# Altium PCB Board_4_Layout.PcbDoc
Units mil, origin at the board's own origin, x right, y up, seen from the top; angles counter-clockwise.
Board outline 4315 x 2510 mil, 4 copper layers (Top Layer 1, Ground 1, Ground 2, Bottom Layer 1), stack 70.112 mil thick; 80 components, 45 nets, 287 pads, 0 vias.
Unrouted connection lines stored in the file: 212.
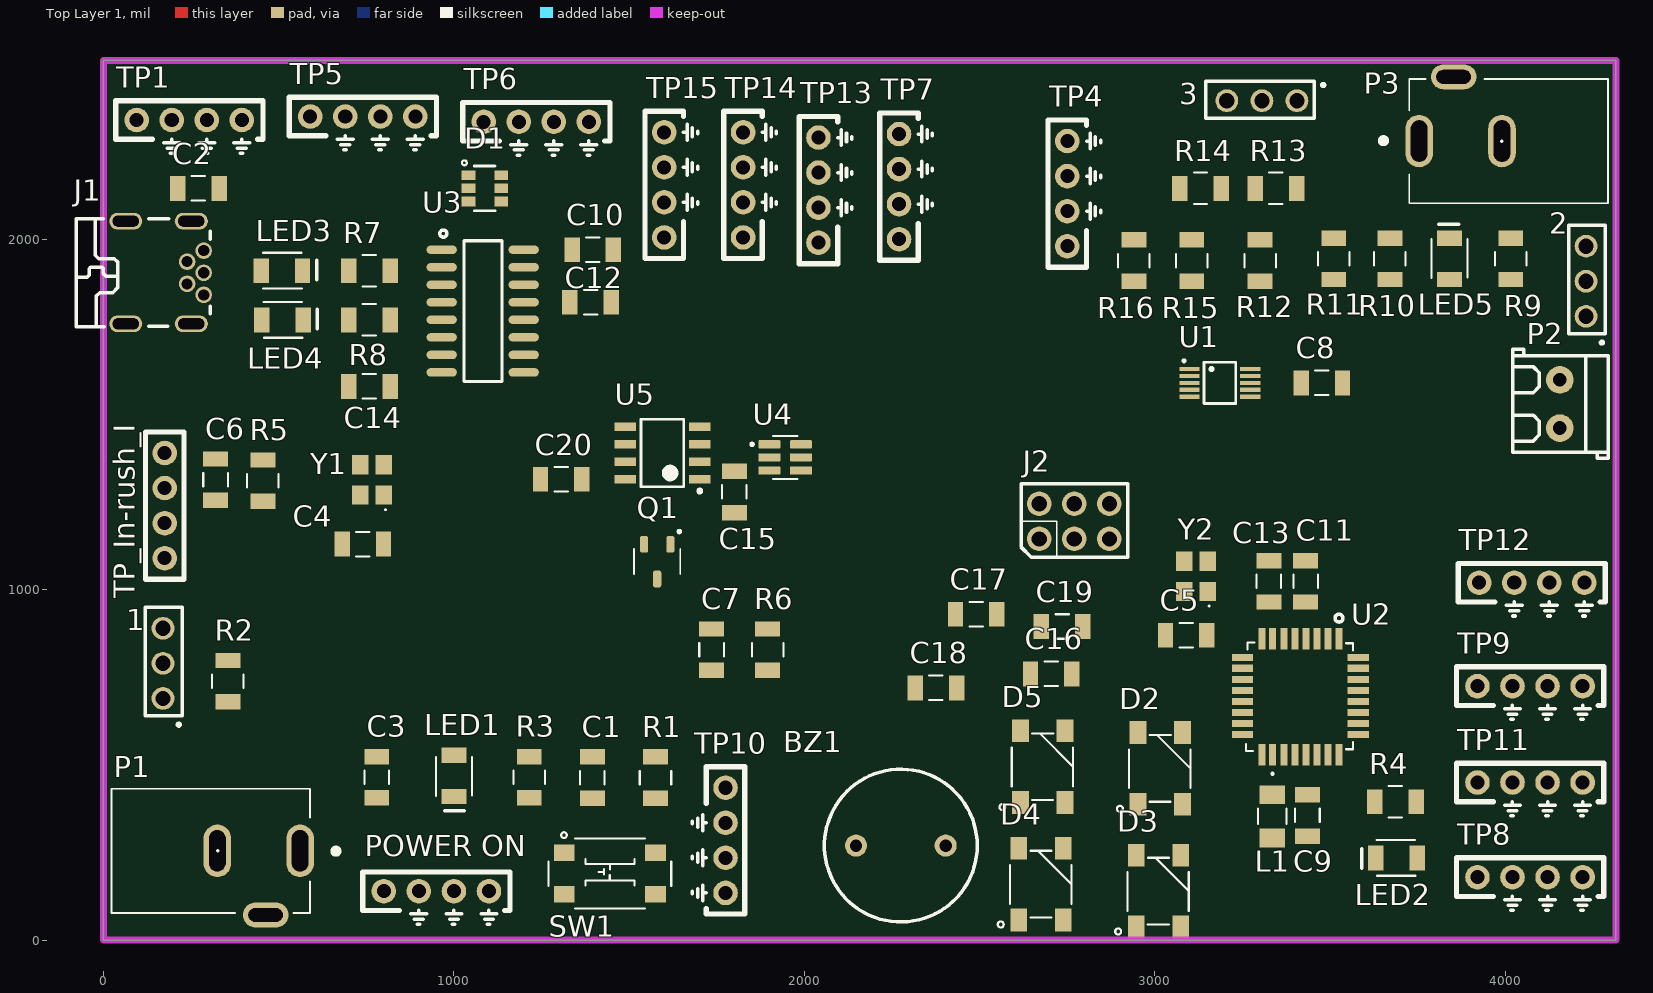
[diagram p0: Top Layer 1 view]
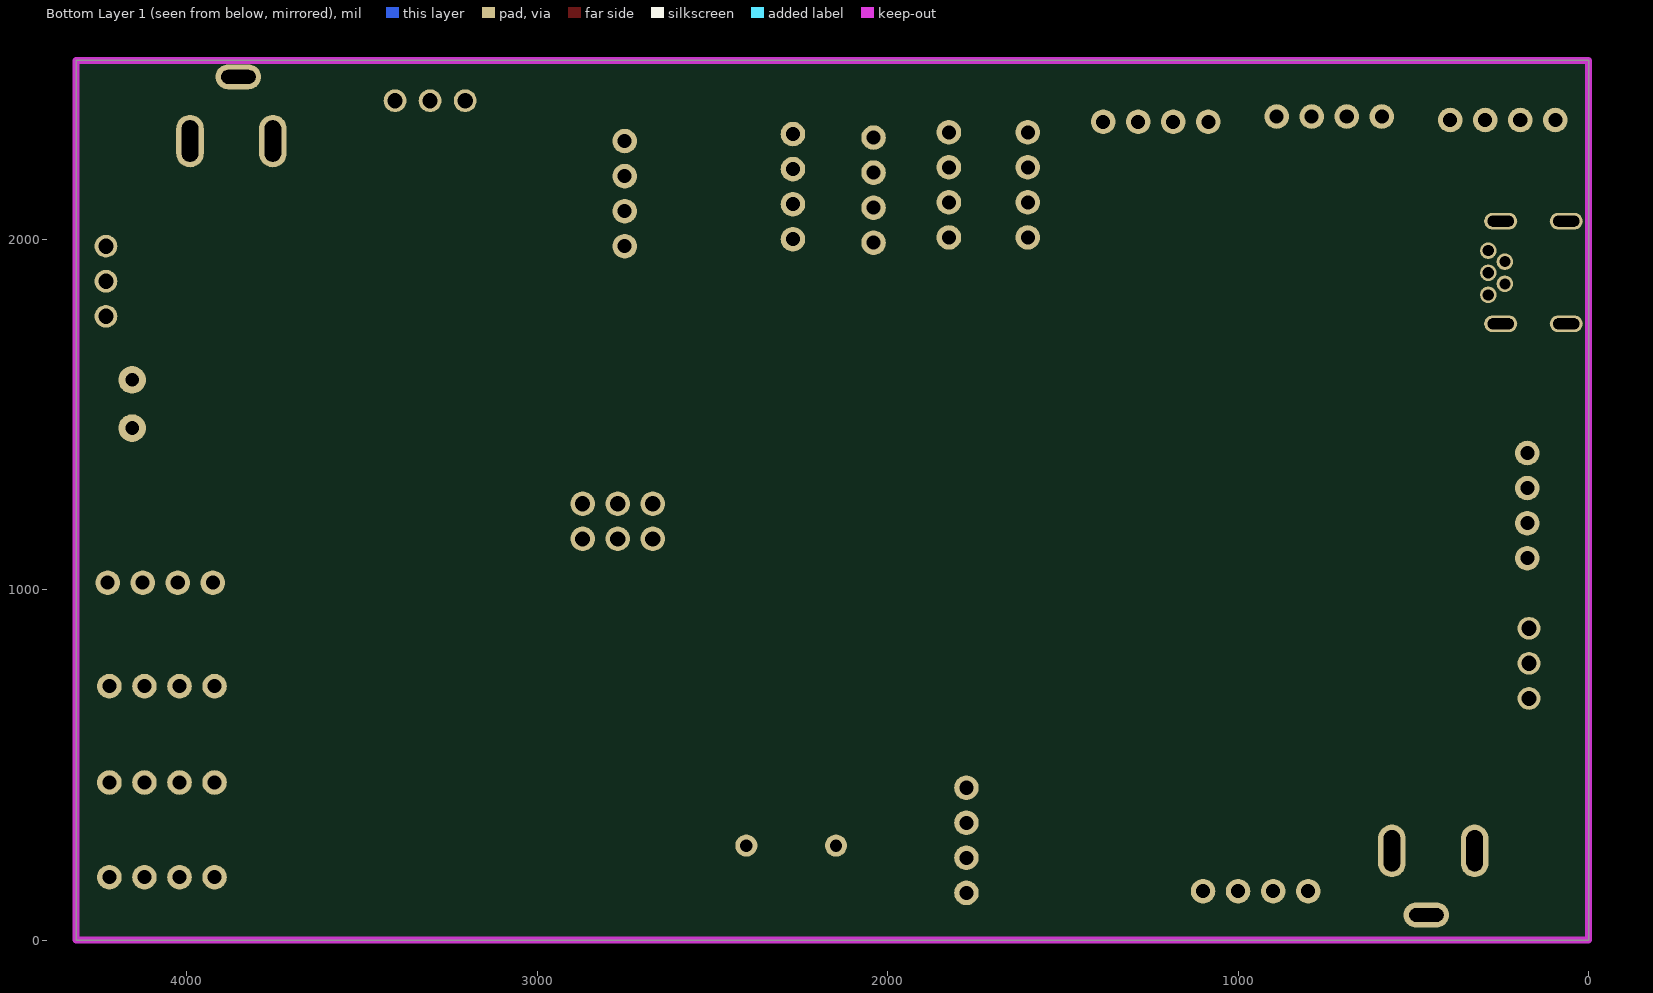
[diagram p1: Bottom Layer 1 view, seen from below]

## Layer stack, top to bottom
Top Solder: solder mask 0.4, Solder Resist, Dk 3.5
Top Layer 1: signal copper 1.378
Dielectric 2: prepreg 2.8, PP-006, Dk 4.1
Ground 1: signal copper 1.378
Dielectric 1: core 59, Core-043, Dk 4.3
Ground 2: signal copper 1.378
Dielectric 3: prepreg 2.8, PP-006, Dk 4.1
Bottom Layer 1: signal copper 1.378
Bottom Solder: solder mask 0.4, Solder Resist, Dk 3.5

## Board outline
0,0 4315,0 4315,2510 0,2510

## Design rules (kind name [scope] priority, off if disabled: settings)
BoardOutlineClearance [All] p1: gap=10 ignorepadtopadclearanceinfootprint=FALSE except(0: Arc-SplitContinuation Track-SplitContinuation SMDPad-SplitContinuation THPad-SplitContinuation Via-SplitContinuation Fill-SplitContinuation Poly-SplitContinuation Region-SplitContinuation Text-SplitContinuation)
Clearance [All] p1: gap=10 ignorepadtopadclearanceinfootprint=FALSE
HoleSize [All] p1: absolutevalues=TRUE maxlimit=120 minlimit=1 maxpercent=80.000 minpercent=20.000
PlaneClearance [All] p1: clearance=10
PlaneConnect [All] p1: planeconnectstyle=Direct reliefexpansion=20 reliefentries=4 reliefconductorwidth=10 reliefairgap=10
PolygonConnect [All] p1: thpad.connectstyle=Relief thpad.reliefconductorwidth=10 thpad.reliefentries=4 thpad.polygonreliefangle="90 Angle" thpad.airgapwidth=10 smdpad.connectstyle=Direct smdpad.reliefconductorwidth=10 smdpad.reliefentries=4 smdpad.polygonreliefangle="90 Angle" smdpad.airgapwidth=10 via.connectstyle=Direct via.reliefconductorwidth=10 via.reliefentries=4 via.polygonreliefangle="90 Angle" via.airgapwidth=10
RoomDefinition PCB_Board4_schematic [InComponentClass('PCB_Board4_schematic')] p1: confinementstyle=ConfineIn formatcopy=TRUE lockcomponents=FALSE outline -1000,2415 14965,2415 14965,3190 -1000,3190
RoutingVias [All] p1: holewidth=13 width=25 viastyle="Through Hole" minholewidth=13 minwidth=25 maxholewidth=60 maxwidth=80
SolderMaskExpansion [All] p1: expansion=4 istentingtop=FALSE
UnRoutedNet [All] p1: checkbadconnections=TRUE
Width "Schematic Width Constraint_4" [InNet('GND')] p1: maxlimit=100 minlimit=10 preferedwidth=20 toplayer_minwidth=20 midlayer1_maxwidth=10 midlayer1_prefwidth=10 midlayer2_maxwidth=10 midlayer2_prefwidth=10 bottomlayer_minwidth=20 minimp=50.000000 maximp=50.000000 favimp=50.000000
Width "Schematic Width Constraint_3" [InNet('ADP_+5V')] p2: maxlimit=100 minlimit=10 preferedwidth=20 toplayer_minwidth=20 midlayer1_maxwidth=10 midlayer1_prefwidth=10 midlayer2_maxwidth=10 midlayer2_prefwidth=10 bottomlayer_minwidth=20 minimp=50.000000 maximp=50.000000 favimp=50.000000
Width "Schematic Width Constraint_2" [InNet('+5V')] p3: maxlimit=100 minlimit=10 preferedwidth=20 toplayer_minwidth=20 midlayer1_maxwidth=10 midlayer1_prefwidth=10 midlayer2_maxwidth=10 midlayer2_prefwidth=10 bottomlayer_minwidth=20 minimp=50.000000 maximp=50.000000 favimp=50.000000
Width "Schematic Width Constraint_1" [InNet('+5')] p4: maxlimit=100 minlimit=10 preferedwidth=20 toplayer_minwidth=20 midlayer1_maxwidth=10 midlayer1_prefwidth=10 midlayer2_maxwidth=10 midlayer2_prefwidth=10 bottomlayer_minwidth=20 minimp=50.000000 maximp=50.000000 favimp=50.000000
Width "Schematic Width Constraint" [InNet('USB_+5V')] p5: maxlimit=100 minlimit=10 preferedwidth=20 toplayer_minwidth=20 midlayer1_maxwidth=10 midlayer1_prefwidth=10 midlayer2_maxwidth=10 midlayer2_prefwidth=10 bottomlayer_minwidth=20 minimp=50.000000 maximp=50.000000 favimp=50.000000
Width [All] p6: maxlimit=100 minlimit=6 preferedwidth=6 minimp=50.000000 maximp=50.000000 favimp=50.000000
26 further rules are at their usual default settings.

## Components (designator, comment, footprint, x,y, rotation, side; value= is the part's Value field where it differs from the comment)
1 "PREC003SAAN-RC" 3_PIN_100mil 170,690 r90 top value="CONN HEADER VERT 3POS 2.54MM"
2 "PREC003SAAN-RC" 3_PIN_100mil 4230,1780 r90 top value="CONN HEADER VERT 3POS 2.54MM"
3 "PREC003SAAN-RC" 3_PIN_100mil 3405,2395 r180 top value="CONN HEADER VERT 3POS 2.54MM"
BZ1 "AT-1224-TWT-5V-2-R" "BUZZER- TH" 2275,270 r90 top
C1 "1uF" 1206_Passive_Capacitor 1395,464 r90 top
C2 "22uF" 1206_Passive_Capacitor 271,2145 r0 top
C3 "22uF" 1206_Passive_Capacitor 780,465 r90 top
C4 "22pF" 1206_Passive_Capacitor 740,1130 r0 top
C5 "22pF" 1206_Passive_Capacitor 3089,870 r0 top
C6 "22pF" 1206_Passive_Capacitor 320,1314 r90 top
C7 "22pF" 1206_Passive_Capacitor 1735,829 r90 top
C8 "22uF" 1206_Passive_Capacitor 3476,1590 r0 top
C9 "22uF" 1206_Passive_Capacitor 3435,356 r90 top
C10 "22uF" 1206_Passive_Capacitor 1396,1970 r180 top
C11 "22uF" 1206_Passive_Capacitor 3430,1024 r270 top
C12 "22uF" 1206_Passive_Capacitor 1390,1820 r180 top
C13 "22uF" 1206_Passive_Capacitor 3325,1024 r270 top
C14 "22uF" 1206_Passive_Capacitor 759,1580 r180 top
C15 "22uF" 1206_Passive_Capacitor 1800,1279 r270 top
C16 "22uF" 1206_Passive_Capacitor 2704,760 r0 top
C17 "22uF" 1206_Passive_Capacitor 2490,930 r0 top
C18 "22uF" 1206_Passive_Capacitor 2375,720 r0 top
C19 "22uF" 1206_Passive_Capacitor 2735,895 r0 top
C20 "22uF" 1206_Passive_Capacitor 1306,1315 r180 top
D1 "SRV05-4-P-T7" TVS 1087.76,2145 r0 top value="TVS DIODE 5.5V 6TSOP"
D2 "IN-PI55QATPRPGPBPW" "SERIAL_LED - duplicate" 3015,490 r90 top
D3 "IN-PI55QATPRPGPBPW" "SERIAL_LED - duplicate" 3010,140 r90 top
D4 "IN-PI55QATPRPGPBPW" "SERIAL_LED - duplicate" 2675,160 r90 top
D5 "IN-PI55QATPRPGPBPW" "SERIAL_LED - duplicate" 2680,495 r90 top
J1 "USB Mini" USB_MINI_B 175,1905 r270 top value="USB mini B"
J2 "NRPN032PAEN-RC" ICSP 2670,1145 r90 top
L1 "FB_10uH_1206" AIML-1206_ABR-M 3335,353.5 r270 top
LED1 "Red" LED_1206 1000,469 r270 top
LED2 "Red" LED_1206 3689,235 r180 top
LED3 "Yellow" LED_1206 509,1910 r0 top
LED4 "Green" LED_1206 511,1770 r0 top
LED5 "Red" LED_1206 3840,1944 r90 top
P1 "Power Jack" Power_Jack 561.22,255 r180 top value="CONN PWR JACK 2X5.5MM SOLDER"
P2 "2P Screw Terminal Block" "P_Terminal block 3.5mm-pitch" 4155,1530 r270 top
P3 "Power Jack" Power_Jack 3753.78,2280 r0 top value="CONN PWR JACK 2X5.5MM SOLDER"
"POWER ON" "10x Probe TP" TP10x_Probe 950,140 r0 top
Q1 "AO3400A" N-MOSFET 1580,1080 r270 top value="N channel"
R1 "10k" 1206_Passive_Resitor 1575,464 r90 top value=10KOhm
R2 "500m" 1206_Passive_Resitor 355,739 r270 top value=500mOhm
R3 "1k" 1206_Passive_Resitor 1215,465 r270 top value="1K Ohm"
R4 "1k" 1206_Passive_Resitor 3686,395 r0 top value="1K Ohm"
R5 "1M" 1206_Passive_Resitor 455,1311 r90 top value="1M Ohm"
R6 "1M" 1206_Passive_Resitor 1895,829 r90 top value="1M Ohm"
R7 "1k" 1206_Passive_Resitor 759,1910 r180 top value="1K Ohm"
R8 "1k" 1206_Passive_Resitor 759,1770 r180 top value="1K Ohm"
R9 "10k" 1206_Passive_Resitor 4015,1944 r270 top value=10KOhm
R10 "10k" 1206_Passive_Resitor 3670,1944 r270 top value=10KOhm
R11 "10k" 1206_Passive_Resitor 3510,1944 r90 top value=10KOhm
R12 "10k" 1206_Passive_Resitor 3300,1939 r90 top value=10KOhm
R13 "10 Ohm" 1206_Passive_Resitor 3345,2145 r180 top
R14 "1 Ohm" 1206_Passive_Resitor 3130,2145 r180 top
R15 "0 Ohm" 1206_Passive_Resitor 3105,1939 r270 top
R16 "0 Ohm" 1206_Passive_Resitor 2940,1939 r90 top
SW1 "TL3305AF160QG" Switch_JLC 1445,190 r0 top
TP1 "10x Probe TP" TP10x_Probe 245,2340 r0 top
TP4 "TP_VRM+" TP10x_Probe 2750,2130 r90 top
TP5 "TP_USB_D+" TP10x_Probe 740,2350 r0 top
TP6 "TP_USB_D-" TP10x_Probe 1235,2335 r0 top
TP7 "TP_DAC_Vout" TP10x_Probe 2270,2150 r90 top
TP8 "TP_SDA" TP10x_Probe 4070,180 r0 top
TP9 "TP_RxD" TP10x_Probe 4070,725 r0 top
TP10 "TP_Buzzer" TP10x_Probe 1775,285 r270 top
TP11 "TP_SCL" TP10x_Probe 4070,450 r0 top
TP12 "TP_TxD" TP10x_Probe 4075,1020 r0 top
TP13 "TP_Vth" TP10x_Probe 2040,2140 r90 top
TP14 "TP_Comp_Out" TP10x_Probe 1825,2155 r90 top
TP15 "TP_Op_Amp_Vout" TP10x_Probe 1600,2155 r90 top
TP_In-rush_I "TP_In-rush_current" TP10x_Floating 175,1240 r90 top
U1 "ADS1115IDGSR" ADC_ADS1115IDGSR 3185,1590 r0 top
U2 "ATMEGA328P-ANR" ATMega328P 3415,695 r90 top value="IC MCU 8BIT 32KB FLASH 32TQFP"
U3 "CH340G" "USB to serial" 1082,1795 r270 top value="USB to Serial"
U4 "DAC IC" MCP4725 1945.08,1377.4 r0 top
U5 "MCP6002T-I/SN" SOIC127P600X175-8N 1595,1390 r180 top
Y1 "X322512MSB4SI" "Crystal resonator" 764.57,1313.3 r90 top value=12MHz
Y2 "X322516MLB4SI" "Crystal resonator" 3114.57,1038.3 r90 top value=16MHz

## Footprints (in the part's own frame and the unit in brackets; to place one, negate y for a bottom-side part, rotate by r counter-clockwise, add the part's x,y. Pads: shape width x height; smd on the part's side, far side on the other; paste and mask are expansions set on the pad)
3_PIN_100mil [mm]
  round 1.65 hole 1.1: 1(0,0) 2(2.54,0) 3(5.08,0)
  silkscreen extent -2,-1.4 6.6,1.27, body extent -1.14,-1.27 6.48,1.27, height 8.38
1206_Passive_Capacitor [mil]
  rect 44x71 smd: 1(-59,0) 2(59,0)
  silkscreen extent -19,-35 19,35, body extent -63,-31 63,32, height 50
1206_Passive_Resitor [mil]
  rect 44x71 smd: 1(-59,0) 2(59,0)
  silkscreen extent -19,-45 19,45, body extent -61,-31 61,31, height 26
ADC_ADS1115IDGSR [mm] "*SOP50P490X110-10N"
  rect 1.45x0.3 smd mask+0.025: 1(-2.2,1)
  rect 1.47x0.3 smd mask+0.025: 2(-2.2,0.5) 3(-2.2,0) 4(-2.2,-0.5) 5(-2.2,-1) 6(2.2,-1) 7(2.2,-0.5) 8(2.2,0) 9(2.2,0.5) 10(2.2,1)
  silkscreen extent -2.68,-1.5 1.15,1.68, body extent -2.44,-1.49 2.46,1.51, height 1.1
AIML-1206_ABR-M [mil]
  rect 54x73 smd paste+0 mask+0: 1(-61.5,0) 2(61.5,0)
  silkscreen extent -124,-41 22,41, body extent -66,-36 66,36, height 55
ATMega328P [mm]
  rect 1.55x0.508 smd mask+0.025: 1(4.2,-2.794) 2(4.2,-2.007) 3(4.2,-1.194) 4(4.2,-0.406) 5(4.2,0.406) 6(4.2,1.194) 7(4.2,2.007) 8(4.2,2.794) 17(-4.2,2.794) 18(-4.2,2.007) 19(-4.2,1.194) 20(-4.2,0.406) 21(-4.2,-0.406) 22(-4.2,-1.194) 23(-4.2,-2.007) 24(-4.2,-2.794)
  rect 0.508x1.55 smd mask+0.025: 9(2.843,4.2) 10(2.056,4.2) 11(1.243,4.2) 12(0.455,4.2) 13(-0.357,4.2) 14(-1.145,4.2) 15(-1.958,4.2) 16(-2.745,4.2) 25(-2.745,-4.2) 26(-1.958,-4.2) 27(-1.145,-4.2) 28(-0.357,-4.2) 29(0.455,-4.2) 30(1.243,-4.2) 31(2.056,-4.2) 32(2.843,-4.2)
  silkscreen extent -3.94,-3.81 5.97,3.94, body extent -4.45,-4.47 4.55,4.53, height 1.16
"BUZZER- TH" [mm]
  round 1.6 hole 0.9: 1(0,3.25) 2(0,-3.25)
  silkscreen extent -5.54,-5.54 5.54,5.53, body extent -6,-6 6,8.75, height 9.05
"Crystal resonator" [mil]
  rect 55.11x47.24 smd: 1(-43.3,-35.43) 2(43.31,-35.43) 3(43.32,31.5) 4(-43.3,31.5)
  silkscreen extent -87,-42 -83,-38, body extent -65,-47 65,47, height 31
ICSP [mil]
  round 70 hole 43.31: 1(0,0) 2(0,-100) 3(0,-200) 4(100,0) 5(100,-100) 6(100,-200)
  silkscreen extent -52,-252 157,52, body extent -44,-250 146,50, height 330
LED_1206 [mil]
  rect 44x71 smd: 1(-59,0) 2(59,0)
  silkscreen extent -54,-51 99,51, body extent -63,-31 63,31, height 28
MCP4725 [mm]
  rrect25% 1.61x0.59 smd: 1(-1.145,0.95) 2(-1.145,0) 3(-1.145,-0.95) 4(1.145,-0.95) 5(1.145,0) 6(1.145,0.95)
  silkscreen extent -2.5,-1.56 0.9,1.56, body extent -1.6,-1.55 1.6,1.55, height 1.45
N-MOSFET [mm]
  rrect50% 1.21x0.59 smd: 1(-1.255,0.95) 2(-1.255,-0.95) 3(1.255,0)
  silkscreen extent -2.28,-1.68 0.89,1.7, body extent -1.55,-1.55 1.45,1.55, height 1.25
"P_Terminal block 3.5mm-pitch" [mm]
  round 2 hole 1: 1(-1.75,0) 2(1.75,0)
  silkscreen extent -3.95,-3.4 3.95,3.5, body extent -3.5,-3.4 3.5,3.4, height 8.4
Power_Jack [mm]
  oval 2x3.8 hole 1.2 slot 3 at 90 deg: 1(0,0) 2(6,0)
  oval 3.3x1.8 hole 1 slot 2.5 at 0 deg: 3(2.5,4.65)
  silkscreen extent -2.79,-4.5 13.68,4.5, body extent -0.76,-4.45 13.64,4.95, height 11.49
"SERIAL_LED - duplicate" [mil] "Footprint for serial LED"
  rect 64.96x47.5 smd: 1(-102.36,63.5) 2(-102.36,-63.5) 3(102.36,-63.5) 4(102.36,63.5)
  silkscreen extent -124,-86 95,124, body extent -106,-98 106,98, height 63
SOIC127P600X175-8N [mm] "SOIC, 8-Leads, Body 4.90x3.90mm, Pitch 1.27mm, IPC Medium Density"
  rect 1.55x0.6 smd: 1(-2.7,1.905) 2(-2.7,0.635) 3(-2.7,-0.635) 4(-2.7,-1.905) 5(2.7,-1.905) 6(2.7,-0.635) 7(2.7,0.635) 8(2.7,1.905)
  silkscreen extent -2.83,-2.45 1.55,2.88, body extent -3,-2.45 3,2.45, height 1.75
Switch_JLC [mm]
  rect 1.5x1.2 smd: 1(-3.3,1.5) 2(3.3,1.5) 3(-3.3,-1.5) 4(3.3,-1.5)
  silkscreen extent -4.44,-2.54 4.45,3, body extent -3.8,-2.29 3.7,2.21, height 3.7
TP10x_Floating [mil] "Small Probs footprint"
  round 70 hole 40: 1(-150,0) 2(-50,0) 3(50,0) 4(150,0)
  silkscreen extent -210,-55 210,55
TP10x_Probe [mil] "Small Probs footprint"
  round 70 hole 40: 1(-150,0) 2(-50,0) 2(50,0) 2(150,0)
  silkscreen extent -210,-95 210,55
TVS [mm]
  rect 1x0.7 smd mask+0.025: 1(-1.162,0.95) 2(-1.162,0) 3(-1.162,-0.95) 4(1.2,-0.95) 5(1.2,0) 6(1.2,0.95)
  silkscreen extent -1.65,-1.63 0.76,2.03, body extent -1.37,-1.44 1.38,1.46, height 1.1
"USB to serial" [mil]
  oval 24x86.61 smd: 1(-175,-117) 2(-125,-117) 3(-75,-117) 4(-25,-117) 5(25,-117) 6(75,-117) 7(125,-117) 8(175,-117) 9(175,117) 10(125,117) 11(75,117) 12(25,117) 13(-25,117) 14(-75,117) 15(-125,117) 16(-175,117)
  silkscreen extent -231,-122 201,56, body extent -197,-118 197,118, height 71
USB_MINI_B [mm]
  round 1.2 hole 0.8: 1(-1.58,2.826) 2(-0.78,1.622) 3(0.02,2.826) 4(0.82,1.622) 5(1.62,2.826)
  oval 1.2x2.4 hole 0.8 slot 1.9 at 90 deg: 6(-3.72,1.924) 7(3.72,1.924) 8(-3.72,-2.826) 9(3.72,-2.826)
  silkscreen extent -3.89,-6.42 3.93,3.3, body extent -4.04,-6.83 4.06,3.02, height 3.98

## Part data
1 2 3: library part SW_3Pin_100mil_Switch, "Connector Header Through Hole 3 position 0.100\" (2.54mm)", LCSC Part#=C49257, Digikey Link=https://www.digikey.com/product-detail/en/PREC003SAAN-RC/S1012EC-03-ND/2774851/?itemSeq=304982371, MFR Part #=PREC003SAAN-RC, Type=Extended
BZ1: library part BUZZER_1, "Buzzers Transducer, Externally Driven Electromechanical/Magnetic 5 V 40mA 2.4kHz 87dB @ 5V, 10cm Through Hole PC Pins", Datasheet=https://www.puiaudio.com/media/SpecSheet/AT-1224-TWT-5V-2-R.pdf, MFR Part #=AT-1224-TWT-5V-2-R
C1: library part C_1uF_1206, "MULTILAYER CERAMIC CAPACITORS MLCC - SMD/SMT 1UF 50V 1206 ROHS", LCSC Part#=C1848, MFR Part #=CL31B105KBHNNNE, Digikey Link=https://www.digikey.com/product-detail/en/C1206C105M4RACTU/399-8150-1-ND/3471873/?itemSeq=304982366, Type=Basic
C2 C3 C8 C9 C10 C11 C12 C13 C14 C15 C16 C17 C18 C19 C20: library part C_22uF_1206, "22uF ±10% 25V X5R 1206 Multilayer Ceramic Capacitors MLCC - SMD/SMT RoHS", LCSC Part#=C12891, MFR Part #=CL31A226KAHNNNE, Datasheet=https://datasheet.lcsc.com/lcsc/1811031514_Samsung-Electro-Mechanics-CL31A226KAHNNNE_C12891.pdf, Type=basic
C4 C5 C6 C7: library part C_22pF_1206, "22pF ±5% 1kV C0G 1206 Multilayer Ceramic Capacitors MLCC - SMD/SMT RoHS", LCSC Part#=C313096, MFR Part #=1206CG220J102NT, Datasheet=https://datasheet.lcsc.com/lcsc/1810311150_FH-Guangdong-Fenghua-Advanced-Tech-1206CG220J102NT_C313096.pdf, Type=Extended
D1: library part D_TVS_Diode, "TVS SOT-23-6 ROHS", LCSC Part#=C85364, Datasheet=https://datasheet.lcsc.com/szlcsc/ProTek-Devices-SRV05-4-P-T7_C85364.pdf, MFR Part #=SRV05-4-P-T7, Type=Basic
D2 D3 D4 D5: library part LED_Smart, "LIGHT EMITTING DIODES (LED) RGB 620~630NM RED, 520~530NM GREEN, 465~475NM BLUE 600MCD@16MARED,1200MCD@16MAGREEN,300MCD@16MABLUE TOP VIEW SMD-4 ROHS", LCSC Part#=C2761795, Manufacturer=Inolux, MFR Part #=IN-PI55QATPRPGPBPW-60, Datasheet=https://datasheet.lcsc.com/lcsc/2106062036_Worldsemi-WS2812B-B-W_C2761795.pdf
J1: library part J_USB_B_Mini, "Through Hole USB Connectors RoHS", LCSC Part#=C46398, MFR Part #=920-462A2021D10102, Datasheet=https://datasheet.lcsc.com/szlcsc/2103081233_Jing-Extension-of-the-Electronic-Co-920-462A2021D10102_C46398.pdf, Type=Extended
J2: library part J_ICSP, "Connector Header Through Hole 6 position 0.079\" (2.00mm)", LCSC Part#=C124384, Digikey Link=https://www.digikey.com/product-detail/en/NRPN032PAEN-RC/S5801-03-ND/804955/?itemSeq=304982355, MFR Part #=NRPN032PAEN-RC, Type=Extended
L1: "25mA 10uH ±10% 800mΩ 1206  Inductors (SMD) ROHS", LCSC Part#=C1051, MFR Part #=CMI321609X100KT, Mfr_Name="FH (Guangdong Fenghua Advanced Tech)", Datasheet=https://datasheet.lcsc.com/lcsc/1810311314_FH--Guangdong-Fenghua-Advanced-Tech-CMI321609X100KT_C1051.pdf, Type=Basic
LED1 LED2 LED5: library part LED_RED_1206, "Red 621~631nm 1206 Light Emitting Diodes (LED) RoHS", LCSC Part#=C93133, MFR Part #=15-21/R6C-FQ1R1B/2T, Datasheet=https://datasheet.lcsc.com/szlcsc/1811151241_Everlight-Elec-15-21-R6C-FQ1R1B-2T_C93133.pdf, Type=Extended
LED3: library part LED_YELLOW_1206, "yellow 1206  Light Emitting Diodes (LED) ROHS", LCSC Part#=C93094, MFR Part #=NCD1206Y1, Datasheet=https://datasheet.lcsc.com/lcsc/2008201033_Foshan-NationStar-Optoelectronics-NCD1206Y1_C93094.pdf, Type=Extended
LED4: library part LED_GREEN_1206, "Green 513~528nm 1206 Light Emitting Diodes (LED) RoHS", LCSC Part#=C434439, MFR Part #=SZYY1206G, Datasheet=https://datasheet.lcsc.com/lcsc/2006301532_Yongyu-Photoelectric-SZYY1206G_C434439.pdf, Type=Extended
P1 P3: library part "P_Power Jack", "Power Barrel Connector Jack 2.10mm ID (0.083\"), 5.50mm OD (0.217\") Through Hole, Right Angle", LCSC Part#=C136744, MFR Part #=PJ-102A, Digikey Link=https://www.digikey.com/product-detail/en/PJ-102A/CP-102A-ND/275425/?itemSeq=304982367, Type=Extended
P2: library part "P_Terminal block", "Green Straight pin 3.5mm  pitch; P=3.5mm  Screw terminal ROHS", LCSC Part#=C474892, Manufacturer="Cixi Kefa Elec", MFR Part #=KF350-3.5-2P, Datasheet=https://datasheet.lcsc.com/lcsc/2001160007_Cixi-Kefa-Elec-KF350-3-5-2P_C474892.pdf
"POWER ON" TP1 TP4 TP5 TP6 TP7 TP8 TP9 TP10 TP11 TP12 TP13 TP14 TP15: library part TP_10x_Probe, "Test Point 300 mil centers"
Q1: library part Q_Nch_MOSFET, "MOSFET N Trench 30V 5.7A 1.5V @ 250uA 26.5 m? @ 5.7A,10V SOT-23-3L RoHS", LCSC Part#=C20917, Datasheet=https://datasheet.lcsc.com/szlcsc/Alpha-Omega-Semicon-AOS-AO3400A_C20917.pdf, MFR Part #=AO3400A, Type=Basic
R1 R9 R10 R11 R12: library part R_10KOhm_1206, "10 kOhms ±5% 0.25W, 1/4W Chip Resistor 1206 (3216 Metric) Automotive AEC-Q200 Thick Film", LCSC Part#=C17902, MFR Part #=RMCF1206FT10K0, Digikey Link=https://www.digikey.com/en/products/detail/stackpole-electronics-inc/RMCF1206FT10K0/1759669, Type=Basic
R2: library part R_500mOhm_1206, "Resistors/Shunt 250mW 500mΩ ±800ppm/℃ ±5% 1206  Current Sense  Resistors ROHS", LCSC Part#=C247433, MFR Part #=1206W4J050KT5E, Datasheet=https://datasheet.lcsc.com/lcsc/1810301438_UNI-ROYAL-Uniroyal-Elec-1206W4J050KT5E_C247433.pdf, Type=Extended
R3 R4 R7 R8: library part R_1K_1206, "CHIP RESISTOR - SURFACE MOUNT 1KOHMS ±1% 1/4W 1206 ROHS", LCSC Part#=C4410, MFR Part #=RNCP1206FTD1K00CT, Digikey Link=https://www.digikey.com/product-detail/en/RNCP1206FTD1K00/RNCP1206FTD1K00CT-ND/2240675/?itemSeq=304982373, Type=Basic
R5 R6: library part R_1M_1206, "CHIP RESISTOR - SURFACE MOUNT 1MOHMS ±1% 1/4W 1206 ROHS", LCSC Part#=C17927, MFR Part #=RMCF1206JT1M00, Digikey Link=https://www.digikey.com/product-detail/en/RMCF1206JT1M00/RMCF1206JT1M00CT-ND/1942830/?itemSeq=304982358, Type=Basic
R13: library part R_10Ohm_1206, "CHIP RESISTOR - SURFACE MOUNT 0.1OHMS ±1% 1/4W 1206 ROHS", LCSC Part#=C17903, MFR Part #=1206W4F100JT5E, Datasheet=https://datasheet.lcsc.com/szlcsc/Uniroyal-Elec-1206W4F100JT5E_C17903.pdf, Type=Basic
R14: library part R_1Ohm_1206, "1Ω ±5% 0.25W ±400ppm/℃ 1206 Chip Resistor - Surface Mount RoHS", LCSC Part#=C1409, MFR Part #=1206W4J010JT5E, Datasheet=https://datasheet.lcsc.com/lcsc/1810301410_UNI-ROYAL-Uniroyal-Elec-1206W4J010JT5E_C1409.pdf, Type=Extended
R15 R16: library part R_0Ohm_1206, "CHIP RESISTOR - SURFACE MOUNT 0OHMS ±1% 1/4W 1206 ROHS", LCSC Part#=C17888, MFR Part #=1206W4F0000T5E, Datasheet=https://datasheet.lcsc.com/szlcsc/Uniroyal-Elec-1206W4F0000T5E_C17888.pdf, Mouser link=https://www.mouser.com/ProductDetail/Royalohm/1206W4F0000T5E?qs=e8oIoAS2J1Thbopin%252BsagQ%3D%3D, Type=Basic
SW1: library part SW_Push_Button_JLC, "Tactile Switch SPST-NO Top Actuated Surface Mount", LCSC Part#=C2837550, MFR Part #=KH-4.5X4.5X4.3H-STM, Datasheet=https://datasheet.lcsc.com/lcsc/2106081532_Shenzhen-Kinghelm-Elec-KH-4.5X4.5X4.3H-STM_C2837550.pdf, Type=Extended
TP_In-rush_I: library part TP_10x_Floating, "Test Point 300 mil centers"
U1: library part U_ADC_ADS1115IDGSR, "16-Bit ADC with Integrated MUX, PGA, Comparator, Oscillator, and Reference 10-VSSOP -40 to 125", LCSC Part#=C37593, Package="MSOP-10 Texas Instruments", Digikey Link=https://www.digikey.com/product-detail/en/texas-instruments/ADS1115IDGSR/296-38849-1-ND/5142969?utm_source=snapeda&utm_medium=aggregator&utm_campaign=symbol, MFR Part #=ADS1115IDGSR, SnapEDA_Link=https://www.snapeda.com/parts/ADS1115IDGSR/Texas%20Instruments/view-part/?ref=snap, Type=Extended
U2: library part U_ATMega328P, "AVR AVR® ATmega Microcontroller IC 8-Bit 20MHz 32KB (16K x 16) FLASH 32-TQFP (7x7)", LCSC Part#=C14877, MFR Part #=ATMEGA328P-AU, Digikey Link=https://www.digikey.com/product-detail/en/ATMEGA328P-ANR/ATMEGA328P-ANRCT-ND/2774230/?itemSeq=304982365, Type=Basic
U3: library part U_USBtoSerial, "Transceiver USB 2.0 2Mbps SOP-16_150mil USB ICs RoHS", LCSC Part#=C14267, Datasheet=https://datasheet.lcsc.com/lcsc/2008191806_WCH-Jiangsu-Qin-Heng-CH340G_C14267.pdf, MFR Part #=CH340G, Type=Basic
U4: library part U_MCP4725A0T-E/CH, "IC DAC 12BIT V-OUT SOT23-6", LCSC Part#=C144198, MFR Part #=MCP4725A0T-E/CH, Datasheet=https://ww1.microchip.com/downloads/en/DeviceDoc/22039d.pdf, Type=Extended
U5: library part U_MCP6002T-I/SN, "0.6 V/us 2 1MHz 1.8V ~ 6V 100μA General Purpose SOIC-8_150mil  Operational Amplifier ROHS", LCSC Part#=C7377, Mfr=Microchip, Datasheet=https://ww1.microchip.com/downloads/en/DeviceDoc/MCP6001-1R-1U-2-4-1-MHz-Low-Power-Op-Amp-DS20001733L.pdf, MFR Part #=MCP6002T-I/SN, Type=Basic
Y1: library part X_12MHz_Res, "SMD Crystal Resonators 12MHz ±10ppm SMD-3225_4P RoHS", LCSC Part#=C9002, Datasheet=https://datasheet.lcsc.com/szlcsc/Yangxing-Tech-X322512MSB4SI_C9002.pdf, MFR Part #=X322512MSB4SI, Type=Basic
Y2: library part X_16Mhz_Res, "±10ppm 16000000Hz -40℃~85℃ 贴片无源晶振 60Ω 9pF SMD3225-4P Crystals ROHS", LCSC Part#=C13738, MFR Part #=X322516MLB4SI, Type=Basic

## Nets (pads, with @x,y where several pads share a name; then routed paths per layer and width w, separated by ;. In a path a pad name is that pad's centre, name@x,y a point inside that pad or via, vN(x,y) a via of type N, cw(c..) or ccw(c..) an arc to the next point about the centre after c; other vN are vias at no path point)
12MHz_Osc-1: C4.2 R5.1 U3.8 Y1.1
12MHz_Osc-2: C6.2 R5.2 U3.7 Y1.3
"16MHz Osc-1": C5.2 R6.1 U2.7 Y2.1
"16MHz Osc-2": C7.2 R6.2 U2.8 Y2.3
328_MISO: J2.1 U2.16
328_MOSI: J2.5 U2.15
328_SCK: J2.2 R4.1 U2.17
+5: C8.1 C15.1 C16.2 C17.2 C18.1 C19.2 C20.1 D2.1 D3.1 D4.1 D5.1 U1.8 U4.3 U5.8
+5V: C10.2 C13.2 D1.5 J2.4 L1.2 LED3.1 LED4.1 R1.2 R2.2 TP_In-rush_I.3 TP_In-rush_I.4 U2.6 U3.16
ADP_+5V: 1.1 "POWER ON.1" C3.2 LED1.1 P1.1
Buzzer: BZ1.1 TP10.1 U2.1
CH340_RxD: R7.1 TP9.1 U2.30 U3.2
CH340_TxD: R8.1 TP12.1 U2.31 U3.3
DAC_Vout: TP7.1 U4.1 U5.3
GND: "POWER ON.2" BZ1.2 C1.2 C2.1 C3.1 C4.1 C5.1 C6.1 C7.1 C8.2 C9.1 C10.1 C11.1 C13.1 C14.2 C15.2 C16.1 C17.1 C18.2 C19.1 C20.2 D1.2 D2.3 D3.3 D4.3 D5.3 J1.5 J1.6 J1.7 J1.8 J1.9 J2.6 LED2.2 P1.2 P1.3 P2.2 P3.2 P3.3 R3.1 R9.2 R15.1 R16.1 SW1.3 SW1.4 TP1.2 TP4.2 TP5.2 TP6.2 TP7.2 TP8.2 TP9.2 TP10.2 TP11.2 TP12.2 TP13.2 TP14.2 TP15.2 U1.3 U2.3 U2.5 U2.21 U3.1 U4.2 U5.4 Y1.2 Y1.4 Y2.2 Y2.4
LED: D5.4 U2.32
Net1_2: 1.2 R2.1 TP_In-rush_I.1 TP_In-rush_I.2
Net2_1: 2.1 P2.1
Net2_3: 2.3 P3.1
Net3_1: 3.1 R13.1
Net3_3: 3.3 R14.2
NetC9_2: C9.2 L1.1 U2.18
NetC11_2: C11.2 U2.4
NetC12_2: C12.2 U3.13
NetC14_1: C14.1 U3.4
NetD2_2: D2.2 D4.4
NetD2_4: D2.4 D3.2
NetD3_4: D3.4 D5.2
NetLED1_2: LED1.2 R3.2
NetLED2_1: LED2.1 R4.2
NetLED3_2: LED3.2 R7.2
NetLED4_2: LED4.2 R8.2
NetLED5_2: LED5.2 R9.1
Op_Amp_Vout: Q1.1 TP14.1 TP15.1 U5.1
R_sense+: 3.2 Q1.2 U1.6 U5.2
R_sense-: R13.2 R14.1 R16.2 U1.7
RESET: C1.1 C12.1 J2.3 R1.1 SW1.1 SW1.2 U2.29
SCL: TP11.1 U1.10 U2.28 U4.5
SDA: TP8.1 U1.9 U2.27 U4.4
USB_+5V: 1.3 C2.2 J1.1 TP1.1
USB_D+: D1.1 J1.3 TP5.1 U3.5
USB_D-: D1.3 J1.2 TP6.1 U3.6
VRM+: R10.1 R11.2 R12.2 TP4.1 U1.4
VRM-: R11.1 R12.1 R15.2 U1.5
Vth: 2.2 LED5.1 Q1.3 R10.2 TP13.1
pads on no net: D1.4 D1.6 D4.2 J1.4 U1.1 U1.2 U2.2 U2.9 U2.10 U2.11 U2.12 U2.13 U2.14 U2.19 U2.20 U2.22 U2.23 U2.24 U2.25 U2.26 U3.9 U3.10 U3.11 U3.12 U3.14 U3.15 U4.6 U5.5 U5.6 U5.7

## Keep-outs
Keep-Out Layer:
  lines w20: 3505,0 0,0 ; 3505,2510 0,2510 ; 0,0 0,2510 ; 0,0 4315,0 4315,2510 0,2510 ; 0,0 0,2510